# EAGLE board ArduBerry 4_0 (EAGLE 6.3)
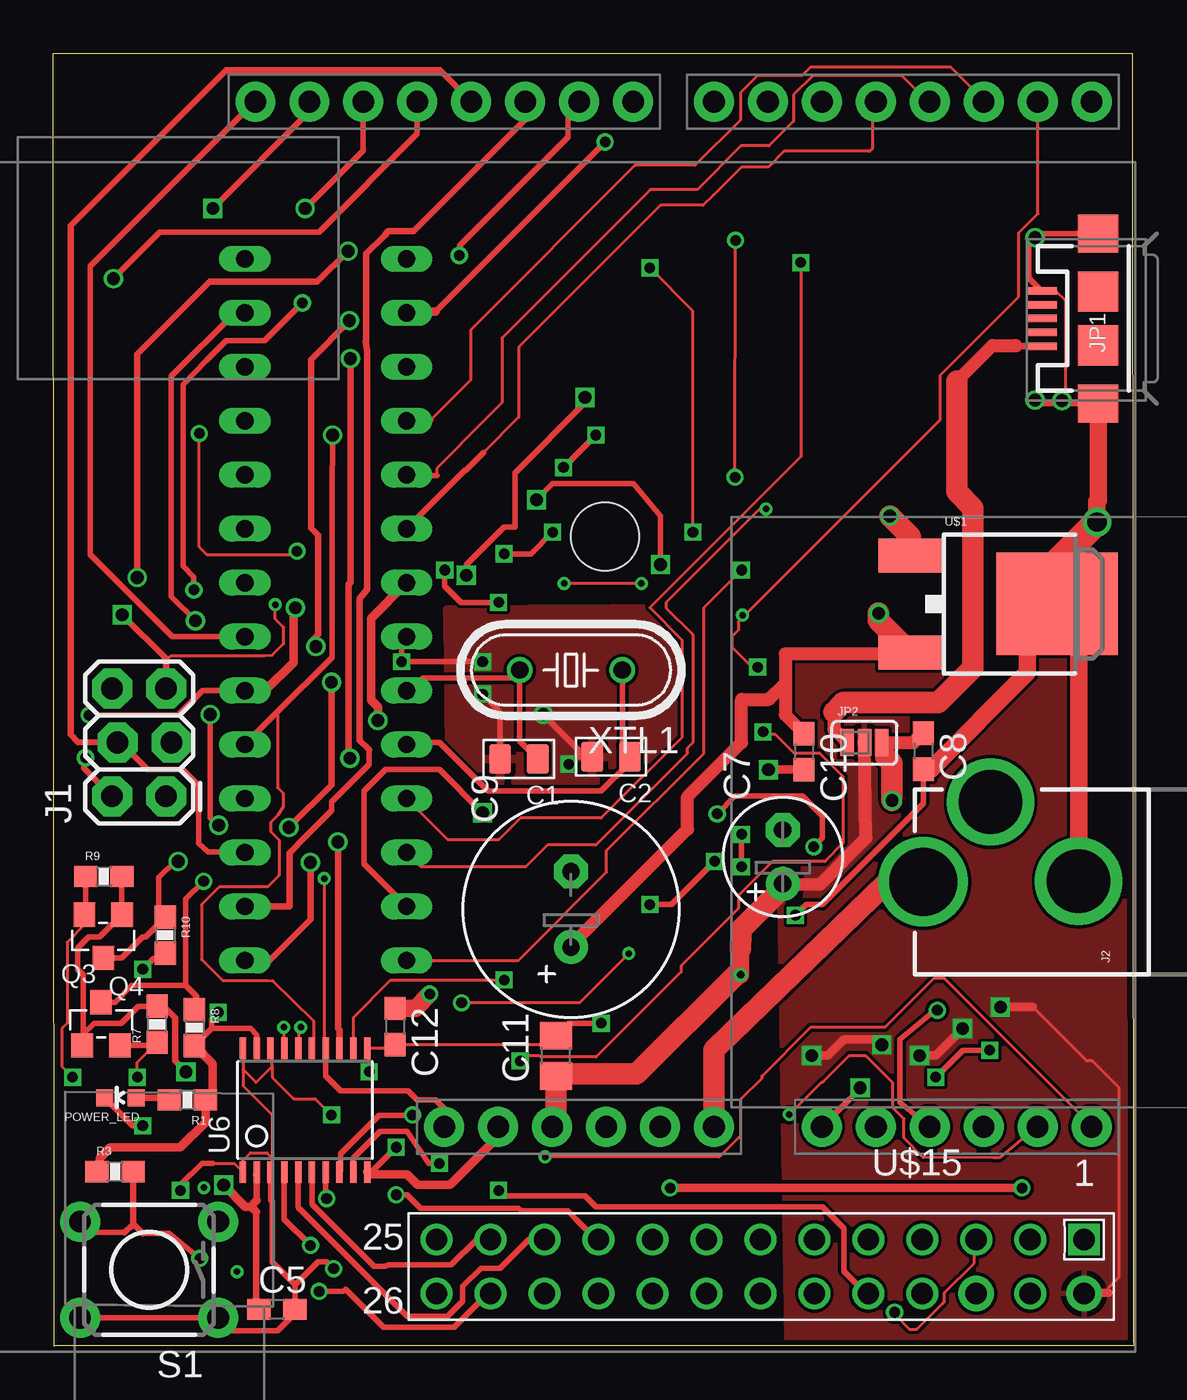
[diagram p0: board, top side]
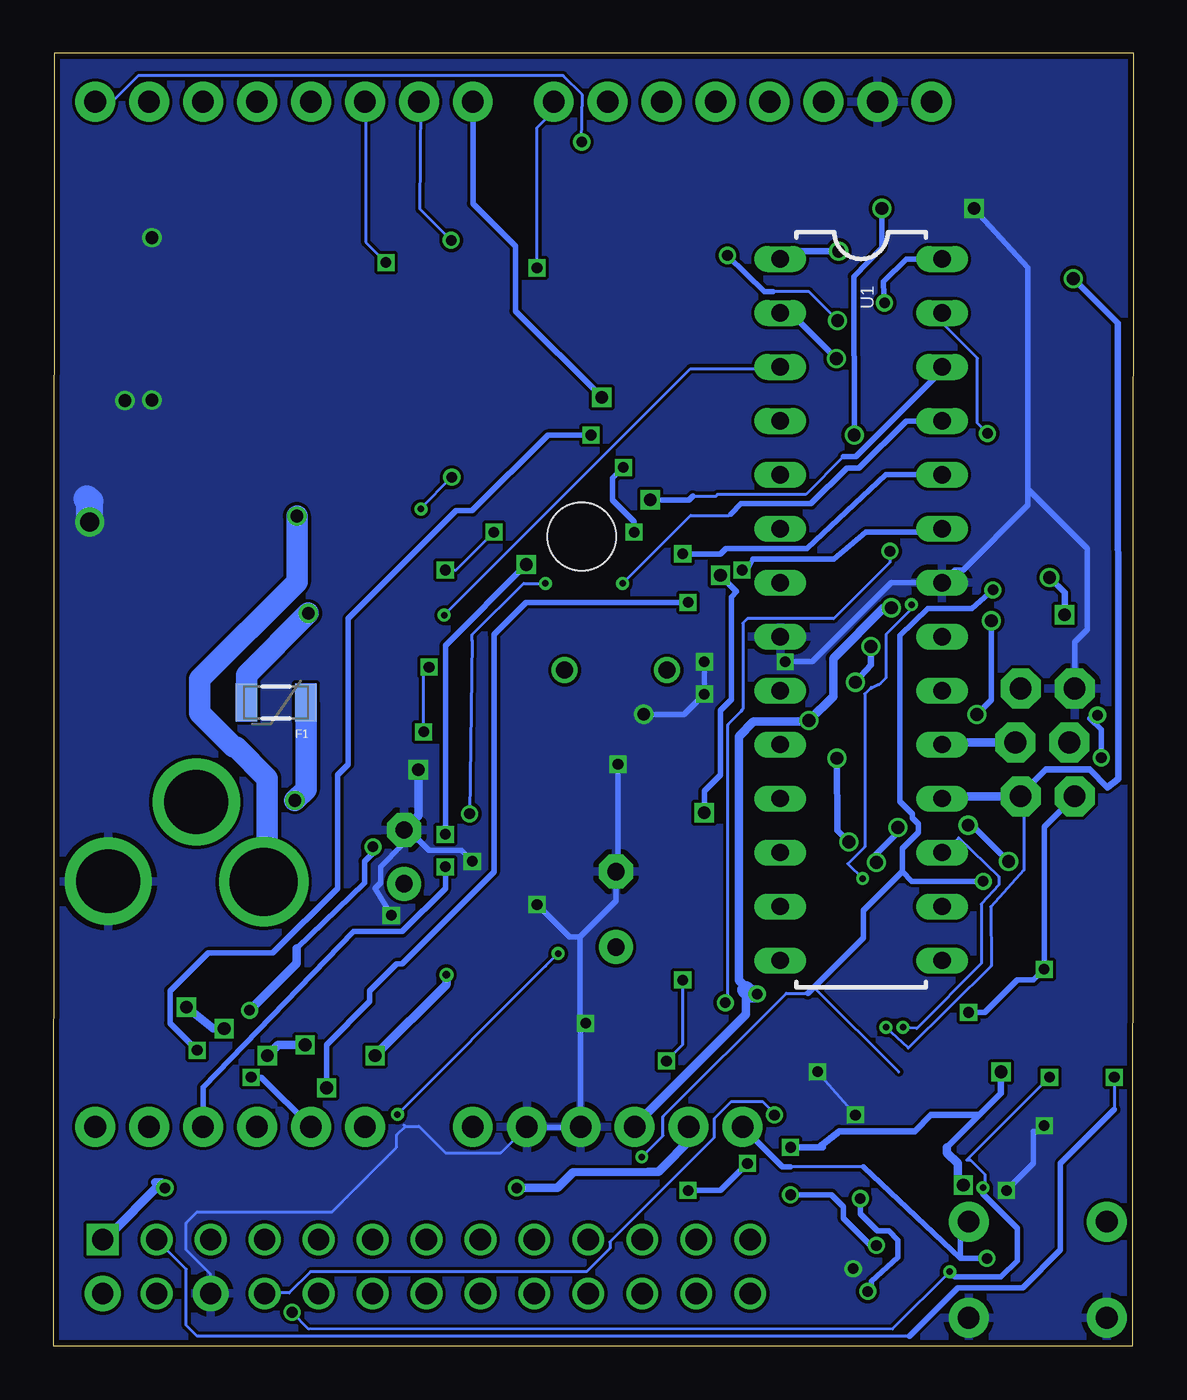
[diagram p1: board, bottom side, seen from below]

Size 50.88 x 60.89 mm. Coordinates in mm from the lower left corner, seen from the top.
Outline: 0.05,0 0,60.89 50.81,60.89 50.86,0.28 50.88,0.02 0.04,0.02
Copper layers (1*2*15*16): Top 0.035mm / dielectric 0.2mm / layer 2 0.0175mm / dielectric 1.1mm / layer 15 0.0175mm / dielectric 0.2mm / Bottom 0.035mm
Design rules "SeeedStudio_DRU_no_angle_20130527": minimum track width 6mil, minimum drill 12mil, track to track 6mil, track to pad 6mil, pad to pad 6mil, via to via 6mil, smd to smd 0mil, copper to edge 10mil, drill to drill 10mil, minimum pad ring 6mil, minimum via ring 6mil, stop-mask expansion 2mil, vias tented up to drill 25mil, thermal gap 10mil
Net classes: 1 DATA: width 0.203 mm, drill 0.305 mm, clearance 0.051 mm; 2 POWER: width 0.152 mm, drill 0.356 mm, clearance 0.051 mm
Holes 3.2 mm at -29.51,11.63 25.99,38.13

## Footprints (pad centres in the part's own frame; a part is rotated, then mirrored left to right if it is on the bottom)
C0805 = smd 1.016 x 1.397: 1 -0.889,0; 2 0.889,0
C0603 = smd 1.1 x 1: 1 -0.85,0; 2 0.85,0
E2,5-6 = drill 0.813 pad 1.6: + -1.27,0 | drill 0.813 pad 1.6 octagon: - 1.27,0
E3,5-10 = drill 0.813 pad 1.6: + -1.778,0 | drill 0.813 pad 1.6 octagon: - 1.778,0
C0805' = smd 1.3 x 1.5: 1 -0.95,0; 2 0.95,0
PTC-1206 = smd 1 x 1.8: 1 -1.4,0; 2 1.4,0
2X3_LOCK = drill 1.016 pad 1.88 octagon: 1 0,0; 2 0,2.54; 3 2.54,-0.254; 4 2.54,2.286; 5 5.08,0; 6 5.08,2.54
POWER_JACK_PTH_LOCK = drill 2.997 pad 4.115: GND 0.025,6.557; GNDBREAK 3.762,10.7 | drill 3.2 pad 4.115: PWR 0,13.878
USB-MICROB = smd 0.35 x 1.4: D+ 0,2.65; D- -0.65,2.65; GND 1.3,2.65; ID 0.65,2.65; VBUS -1.3,2.65 | smd 1.8 x 1.9: MT1 -4,0; MT2 4,0 | smd 1.9 x 1.9: P$1 -1.27,0; P$2 1.27,0
SJ_3_PASTE1&2 = smd 0.635 x 1.27: 1 -0.813,0; 2 0,0; 3 0.813,0
LED-0603 = smd 0.8 x 0.8: A 0,-0.75; C 0,0.75
SOT23 = smd 1.016 x 1.143: 1 -0.889,-1.016; 2 0.889,-1.016; 3 0,1.016
0603-RES = smd 1.1 x 1: 1 -0.85,0; 2 0.85,0
TACTILE-PTH = drill 1.016 pad 1.88: 1 -3.251,2.261; 2 3.251,2.261; 3 -3.251,-2.261; 4 3.251,-2.261
DIL28-3 = drill 0.813 long: 1 -16.51,-3.81; 2 -13.97,-3.81; 3 -11.43,-3.81; 4 -8.89,-3.81; 5 -6.35,-3.81; 6 -3.81,-3.81; 7 -1.27,-3.81; 8 1.27,-3.81; 9 3.81,-3.81; 10 6.35,-3.81; 11 8.89,-3.81; 12 11.43,-3.81; 13 13.97,-3.81; 14 16.51,-3.81; 15 16.51,3.81; 16 13.97,3.81; 17 11.43,3.81; 18 8.89,3.81; 19 6.35,3.81; 20 3.81,3.81; 21 1.27,3.81; 22 -1.27,3.81; 23 -3.81,3.81; 24 -6.35,3.81; 25 -8.89,3.81; 26 -11.43,3.81; 27 -13.97,3.81; 28 -16.51,3.81
DUEMILANOVE_VIAS = drill 1.016 pad 1.88: 3.3V 50.8,13.97; 5V 50.8,16.51; A0 50.8,29.21; A1 50.8,31.75; A2 50.8,34.29; A3 50.8,36.83; A4 50.8,39.37; A5 50.8,41.91; AREF 2.54,2.54; D2 2.54,36.83; D3 2.54,34.29; D4 2.54,31.75; D5 2.54,29.21; D6 2.54,26.67; D7 2.54,24.13; D8 2.54,20.32; D9 2.54,17.78; D10 2.54,15.24; D11 2.54,12.7; D12 2.54,10.16; D13 2.54,7.62; GND@0 50.8,19.05; GND@1 50.8,21.59; GND@2 2.54,5.08; RES 50.8,11.43; RX 2.54,41.91; TX 2.54,39.37; VIN 50.8,24.13
TSSOP20 = smd 0.305 x 0.991: 1 -2.925,-2.918; 2 -2.275,-2.918; 3 -1.625,-2.918; 4 -0.975,-2.918; 5 -0.325,-2.918; 6 0.325,-2.918; 7 0.975,-2.918; 8 1.625,-2.918; 9 2.275,-2.918; 10 2.925,-2.918; 11 2.925,2.918; 12 2.275,2.918; 13 1.625,2.918; 14 0.975,2.918; 15 0.325,2.918; 16 -0.325,2.918; 17 -0.975,2.918; 18 -1.625,2.918; 19 -2.275,2.918; 20 -2.925,2.918
DPAK = smd 1.6 x 3: 1 -2.28,-5.31; 3 2.28,-5.31 | smd 4.826 x 5.715: 4 0,1.588
RASPBERRY-PI_REV1 = drill 1 square: 1 -41.91,21.59 | drill 1 pad 1.676: 2 -41.91,24.13; 6 -36.83,24.13 | drill 1: 3 -39.37,21.59; 4 -39.37,24.13; 5 -36.83,21.59; 7 -34.29,21.59; 8 -34.29,24.13; 9 -31.75,21.59; 10 -31.75,24.13; 11 -29.21,21.59; 12 -29.21,24.13; 13 -26.67,21.59; 14 -26.67,24.13; 15 -24.13,21.59; 16 -24.13,24.13; 17 -21.59,21.59; 18 -21.59,24.13; 19 -19.05,21.59; 20 -19.05,24.13; 21 -16.51,21.59; 22 -16.51,24.13; 23 -13.97,21.59; 24 -13.97,24.13; 25 -11.43,21.59; 26 -11.43,24.13
HC49/S = drill 0.813: 1 -2.413,0; 2 2.413,0

## Placement (x,y rotation side)
C1  22pF  [C0805]  21.93,27.66 180 top
C2  22pF  [C0805]  26.27,27.76 180 top
C5  0.1uf  [C0603]  10.54,1.75 0 top
C7  120uf  [E2,5-6]  34.35,23.05 90 top
C8  0.1uf  [C0603]  40.97,28.02 270 top
C9  1000uf  [E3,5-10]  24.38,20.58 90 top
C10  0.1uf  [C0603]  35.35,28 270 top
C11  10uf  [C0805']  23.68,13.69 90 top
C12  0.1uf  [C0603]  16.1,15.06 270 top
F1  PTCSMD  [PTC-1206]  40.37,30.32 180 bottom
J1  AVR_SPI_PRG_62X3_LOCK  [2X3_LOCK]  5.32,25.89 90 top
J2  POWER_JACKPTH_LOCK  [POWER_JACK_PTH_LOCK]  54.84,21.87 90 top
JP1  USB-MICROB  [USB-MICROB]  49.2,48.39 90 top
JP2  JUMPER-31-2  [SJ_3_PASTE1&2]  38.2,28.42 0 top
POWER_LED  GREEN  [LED-0603]  3.17,11.71 90 top
Q3  MOSFET-N-044020001  [SOT23]  2.26,15.19 0 top
Q4  MOSFET-N-044020001  [SOT23]  2.36,19.3 180 top
R1  330ohm  [0603-RES]  6.32,11.6 180 top
R3  10kOhm  [0603-RES]  2.92,8.23 0 top
R7  10k  [0603-RES]  4.9,15.16 90 top
R8  10k  [0603-RES]  6.65,15.01 270 top
R9  10k  [0603-RES]  2.39,22.12 0 top
R10  10k  [0603-RES]  5.28,19.35 270 top
S1  [TACTILE-PTH]  4.52,3.61 180 top
U1  ATMEGA328P_PDIP  [DIL28-3]  12.83,34.68 270 bottom
U2  ARDUINO_SHIELDNO_SILK  [DUEMILANOVE_VIAS]  6.98,61.14 270 top
U6  [TSSOP20]  11.86,11.13 0 top
U$1  LM2931_FIXED  [DPAK]  45.67,34.95 270 top
U$15  RASPBERRY-PI_REV1  [RASPBERRY-PI_REV1]  6.63,26.62 180 top
XTL1  [HC49/S]  24.38,31.84 180 top

## Library data of the parts
C1 C2 Q3 Q4 = OPL
C5 C8 C10 C12 = resistor
C7 C9 C11 = rcl
F1 = zz SparkFun
J1 J2 = SparkFun-Connectors
JP1 = SparkFun-Connectors; PROD_ID: CONN-09505
JP2 = SparkFun-Passives
POWER_LED = SparkFun-LED; PROD_ID: DIO-00821
R1 R3 R7-R10 = SparkFun-Resistors
S1 = SparkFun-Electromechanical
U1 = SparkFun-DigitalIC
U2 = SparkFun-Boards
U6 = adafruit
U$1 = SparkFun-PowerIC
U$15 = RaspberryPi
XTL1 = crystal; OC_FARNELL: 1667008; OC_NEWARK: unknown

## Nets
5V_IN_USB: JP1.VBUS JP2.1
+3V3 [POWER]: C5.1 Q3.1 Q4.1 R7.2 R9.2 U2.3.3V U6.2 U6.10 U$15.1
+5V [POWER]: C7.+ C11.1 C12.1 J1.2 JP2.2 R1.1 R3.1 R8.2 R10.2 U1.7 U1.20 U2.5V U6.19 U$15.2
ARDUINO_RX: U1.2 U2.RX U6.13
ARDUINO_TX: U1.3 U2.TX U6.12
AREF [DATA]: U1.21 U2.AREF
GND: C1.2 C2.2 C5.2 C7.- C8.2 C9.- C10.2 C11.2 C12.2 J1.6 J2.GND JP1.GND JP1.MT1 JP1.MT2 POWER_LED.C S1.1 S1.2 U1.8 U1.22 U2.GND@0 U2.GND@1 U2.GND@2 U6.1 U6.3 U6.11 U6.18 U6.20 U$1.4 U$15.6
MISO: J1.1 U1.18 U2.D12 U6.16
MOSI: J1.4 U1.17 U2.D11 U6.17
N$4: U$15.26
N$11: POWER_LED.A R1.2
N$48: U$15.7
N$49: U$15.9
N$50: U$15.11
N$51: U$15.13
N$52: U$15.15
N$53: U$15.17
N$54: U$15.25
N$61: U$15.22
N$62: U$15.20
N$63: U$15.18
N$64: U$15.16
N$65: U$15.14
N$66: U$15.12
OSC1: C1.1 U1.9 XTL1.2
OSC2: C2.1 U1.10 XTL1.1
PB0: U1.14 U2.D8
PB1: U1.15 U2.D9
PB2: U1.16 U2.D10
PC0: U1.23 U2.A0
PC1: U1.24 U2.A1
PC2: U1.25 U2.A2
PC3: U1.26 U2.A3
PD2: U1.4 U2.D2
PD3: U1.5 U2.D3
PD4: U1.6 U2.D4
PD5: U1.11 U2.D5
PD6: U1.12 U2.D6
PD7: U1.13 U2.D7
REG_OUT [POWER]: C8.1 F1.1 JP2.3
RESET: J1.5 R3.2 S1.3 S1.4 U1.1 U2.RES U6.14
RPI_MISO: U6.5 U$15.21
RPI_MOSI: U6.4 U$15.19
RPI_RESET: U6.7 U$15.24
RPI_RX: U6.9 U$15.10
RPI_SCK: U6.6 U$15.23
RPI_SCL: Q3.2 R7.1 U$15.5
RPI_SDA: Q4.2 R9.1 U$15.3
RPI_TX: U6.8 U$15.8
SCK: J1.3 U1.19 U2.D13 U6.15
SCL: Q3.3 R8.1 U1.28 U2.A5
SDA: Q4.3 R10.1 U1.27 U2.A4
VIN: J2.PWR U2.VIN U$1.1
VIN_5V: C9.+ C10.1 F1.2 U$1.3

## Tracks (layer width: path | path; a pad name or v marks a point on that pad's centre or on a via)
5V_IN_USB
  Top 0.305: 45.34,47.09 JP1.VBUS
  Top 0.61: 42.55,45.44 44.22,47.12 45.31,47.12 45.34,47.09 | 36.75,29.87 36.75,29.06 JP2.1
  Top 1.016: 42.55,45.44 42.55,40.23 43.31,39.47 43.31,31.93 41.68,30.3 37.19,30.3 36.75,29.87
+3V3  (via drill 0.5, 0.6)
  Top 0.254: R9.2 3.24,20.33 Q4.1 3.23,20.32 2.18,19.28 1.68,19.28 1.17,18.77 1.17,17.75 1.42,17.5 1.42,14.71 | 1.42,14.71 1.42,14.22 Q3.1 | R7.2 4,16.01 3.2,15.21 1.93,15.21 1.42,14.71
  Top 0.305: R7.2 5.2,16.01 5.74,15.47 5.74,13.44 v6.25,12.93 | 9.55,6.32 9.55,1.89 C5.1 | 9.59,6.87 U6.2 9.59,8.14 9.55,8.1 | U6.10 14.99,8.21 v16.15,9.37
  Top 0.406: v45.61,7.46 v29.05,7.46 | U2.3.3V 20.96,9.86 18.69,7.59 17.17,7.59 16.66,8.1 14.89,8.1 U6.10 | v8.03,7.59 9.04,6.58 9.3,6.58 | 9.3,6.58 9.55,6.32 | 9.3,6.58 9.59,6.87
  Bottom 0.305: v6.25,12.93 6.25,11.91 7.26,10.9 | 7.26,10.9 8.79,9.37 | 14.63,9.37 14.83,9.37 | 14.83,9.37 13.87,10.13 10.31,10.13 9.55,10.9 7.26,10.9 | v16.15,9.37 15.08,9.37 14.83,9.37
  Bottom 0.406: v29.05,7.46 28.73,7.47 27.13,7.47 26.39,8.2 22.86,8.22 22.39,8.22 20.73,9.88 20.73,10.11 U2.3.3V | v45.61,7.46 46.06,7.72 45.76,7.72 48.36,5.12 U$15.1 | 8.79,9.37 8.79,9.12 8.28,8.61 8.28,7.85 v8.03,7.59
+5V  (via drill 0.36, 0.5, 0.6)
  Top 0.152: U6.19 9.59,13.98 9.55,13.94 | 49.68,2.51 49.68,2.77 50.19,3.28 50.19,12.17 48.92,13.44 48.67,13.44 46.13,15.98
  Top 0.254: U1.20 7.05,30.87 5.89,29.72 v1.7,29.72 | v1.52,27.71 1.45,27.22 J1.2 | 7.52,11.95 R1.1 | U6.19 9.59,14.67 9.3,14.96 7.45,14.96 | 7.45,14.96 R8.2 6.72,14.16 | R10.2 5.53,18.26 4.72,18.26 v4.22,17.75 | 7.45,14.96 7.45,15.4 v7.77,15.72
  Top 0.406: U2.5V 23.68,10.34 | U1.20 9.99,30.87 11.33,32.21 11.33,34.7 v11.4,34.77 | v15.29,29.46 15.29,30.1 14.96,30.43 14.96,34.27 U1.7 | 34.26,21.52 C7.+ | 23.86,12.82 C11.1 | 32.16,17.52 v32.36,17.5 | 7.52,11.95 7.52,13.3 R8.2 | v35.71,13.69 36.47,13.69 37.24,14.45 38.76,14.45 v39.01,14.2 | v40.79,13.69 41.55,13.69 v42.82,14.96 | v44.6,15.98 46.13,15.98 | 49.68,2.51 48.56,2.51 U$15.2 | R1.1 7.17,10.55 5.99,9.37 2.69,9.37 2.18,8.86 2.18,8.34 R3.1
  Top 0.61: C7.+ 36.1,21.75 38.28,23.93 JP2.2
  Top 0.813: 32.36,18.72 v32.36,17.5 | C12.1 17.06,15.91 v17.73,16.59
  Top 1.016: 23.68,10.34 C11.1 | 32.36,18.72 32.39,19.41 32.41,19.65 34.26,21.52 | 23.86,12.82 27.46,12.82 32.16,17.52
  Bottom 0.254: v1.7,29.72 2.06,29.57 1.52,29.03 v1.52,27.71 | J1.2 4.22,24.45 v4.22,17.75 4.72,17.25 5.49,17.25 7.01,15.72 v7.77,15.72
  Bottom 0.406: v11.4,34.77 11.76,34.77 14.15,32.38 14.15,30.61 v15.29,29.46 15.46,29.42 17.89,29.42 18.59,28.72 18.59,17.22 18.26,16.89 18.26,16.79 18.26,15.62 23.46,10.42 U2.5V | v32.36,17.5 32.36,17.04 v35.71,13.69 | v39.01,14.2 40.28,14.2 v40.79,13.69 | v42.82,14.96 43.33,14.96 v44.6,15.98
  Bottom 0.813: v17.73,16.59 18.06,16.59 18.26,16.79
  pour Top: 33.78,49.5 34.54,0.23 50.65,0.13 50.75,49.61
ARDUINO_RX  (via drill 0.5, 0.6)
  Top 0.254: 18.01,48.72 v25.99,56.7
  Top 0.305: v14,46.51 14,35.97 13.92,35.89 13.92,30.23 13.92,27.66 v13.97,27.69 | v13.41,23.75 13.41,14.96 13.49,14.88 U6.13
  Top 0.406: 18.01,48.72 16.71,48.72 U1.2
  Bottom 0.152: v25.99,56.7 25.96,58.92 26.86,59.82 46.86,59.82 48.06,58.62 48.86,58.62 U2.RX
  Bottom 0.305: U1.2 16.14,48.65 v14,46.51 | v13.97,27.69 13.94,24.28 v13.41,23.75
ARDUINO_TX  (via drill 0.3, 0.5)
  Top 0.152: 32.51,34.37 32.26,34.12 32.26,33.72 31.96,33.42 31.96,32.92 32.9,31.98 v33.17,31.98 | v32.46,34.42 32.51,34.37 | 32.51,34.37 41.76,43.62 41.76,45.72 45.46,49.42 45.46,52.42 46.36,53.32 46.36,58.42 U2.TX | U6.12 14.14,15.48 15.9,17.25 v21.23,17.25 | v22,13.44 22.25,13.69 22.89,13.69 22.96,13.62 25.56,13.62 29.56,17.62 29.56,17.92 32.26,20.62 32.26,21.22 33.86,22.82 36.34,22.82 37.19,23.69 37.19,25.52 37.19,26.82 36.07,27.94 34.87,27.94 34.01,28.8 33.55,28.8 v33.43,28.93
  Top 0.254: U2.TX 46.36,58.52
  Top 0.305: U1.3 17.64,46.11
  Bottom 0.152: v32.46,34.42 20.86,46.02 16.66,46.02 U1.3 | v21.23,17.25 21.23,14.2 v22,13.44 | v33.43,28.93 33.43,31.72 v33.17,31.98
AREF
  Top 0.254: U2.AREF 9.5,58.6 1.75,50.85 1.75,37.29 5.61,33.43 9.01,33.43 U1.21
GND  (via drill 0.48, 0.5, 0.6, 0.9)
  Top 0.152: 34.26,24.22 C7.- | 46.25,44.48 46.26,44.52 v46.23,44.55 | 46.13,52.25 46.16,52.22 v46.23,52.2 | 10.31,8.86 10.31,10.9 8.94,12.27 U6.20 8.94,13.03 9.55,12.42 10.31,13.18 | 10.31,8.86 10.31,8.28 U6.3 | 10.31,13.18 10.31,13.97 U6.18 | POWER_LED.C 2.42,11.68 | 7.52,8.61 8.53,8.61 U6.1 8.94,8.76 9.3,9.12 10.06,9.12 10.31,8.86 | 10.31,13.18 10.31,12.67 11.33,11.66 12.34,11.66 v13.11,10.9 | v14.88,12.93 14.88,13.95 U6.11 15.93,14.04 C12.2 23.25,14.21 C11.2 | JP1.GND 47.21,49.69 47.65,49.25 47.65,44.68 v47.5,44.53
  Top 0.254: JP1.MT2 46.27,52.39 46.13,52.25 45.95,52.07 45.95,50.29 JP1.GND | JP1.MT1 46.34,44.39 46.25,44.48 | 11.39,2.91 C5.2 11.39,1.56 10.57,0.74 8.38,0.74 S1.1 S1.2 | 11.39,2.91 12.47,3.99 12.88,3.99 v13.21,3.66 | U2.GND@2 12.07,58.12 v7.52,53.57 | v23.07,29.76 25.17,27.66 25.3,27.66 25.38,27.74 C2.2 24.63,27.76 v24.28,27.41 | U1.8 16.41,33.18 v16.41,32.23 v20.22,32.23 | U6.3 10.24,6.91 10.31,6.83 10.31,3.99 11.39,2.91 | C1.2 21.04,29.64 20.98,29.69 20.98,29.95 v20.22,30.71 | C8.2 40.97,25.55 36.22,20.8 35.46,20.8 v34.95,20.29 | v25.81,15.21 24.26,15.21 23.25,14.21 23.28,14.21 23.77,14.71 | v28.09,20.8 29.11,20.8 v31.14,22.83 | v5.99,7.34 5.99,7.59 7.01,8.61 7.52,8.61 | v4.22,10.39 3.74,10.39 POWER_LED.C
  Top 0.406: C10.2 v33.68,27.15
  Top 0.813: J2.GND 48.28,33.93 U$1.4 | C8.2 41.31,27.17 45.87,31.72 45.87,34.66 47.26,36.04 | JP1.MT1 49.2,39.83 49.15,39.78 v49.15,38.81
  Top 1.27: U$1.4 47.26,36.04 47.26,36.92 v49.15,38.81
  Bottom 0.152: 34.36,10.42 34.29,10.36 | 26.16,10.32 U2.GND@0 | U$15.6 43.46,3.4 44.6,4.55 44.6,5.82 44.09,6.32 37.74,6.32 34.7,9.37 34.7,9.95 34.29,10.36 | 34.29,10.36 33.65,10.36 32.41,9.12 29.79,9.12 28.94,9.97 U2.GND@1 | v13.11,10.9 v14.88,12.93
  Bottom 0.254: v13.21,3.66 13.21,3.61 13.23,3.58 | v7.52,53.57 4.98,50.77 4.98,40.36 | 4.98,40.36 4.98,39.6 8.03,36.55 8.42,36.55 U1.22 11.42,35.95 15.14,32.23 v16.41,32.23 | J1.6 2.78,33.16 2.18,33.76 2.18,37.57 4.98,40.36 | v24.28,27.41 24.28,22.45 C9.- 24.38,20.96 26.06,19.28 | v20.22,32.23 v20.22,30.71 21.17,29.76 v23.07,29.76 | v34.95,20.29 35.71,21.56 35.46,21.82 35.46,22.58 34.44,23.6 34.44,24.23 C7.- 33.88,23.85 33.68,23.85 33.17,23.34 31.65,23.34 v31.14,22.83 | 26.06,19.28 26.06,15.47 v25.81,15.21 26.04,14.99 U2.GND@0 | 26.06,19.28 26.57,19.28 v28.09,20.8 | 26.16,10.32 28.59,10.32 28.94,9.97 | v5.99,7.34 4.72,8.61 4.72,10.13 4.47,10.13 v4.22,10.39
  Bottom 0.406: v33.68,27.15 33.68,24.99 C7.-
  Bottom 1.27: v49.15,38.81 49.15,39.78 49.28,39.9
  pour Bottom: 0.03,64.74 50.93,64.74 50.93,-0.28 0.1,-0.28 0.1,64.14
  pour Top: 18.54,34.7 30.01,34.77 30.1,26.22 18.67,26.12 18.57,34.11
MISO  (via drill 0.3, 0.6)
  Top 0.152: v11.66,15.02 11.56,14.92 11.56,14.12 U6.16
  Top 0.254: U2.D12 17.15,57.1 12.52,52.45 5.03,52.45 3.44,50.89 3.2,50.65
  Top 0.305: v2.84,50.27 2.84,50.29 3.44,50.89
  Bottom 0.152: v11.66,15.02 10.61,14.04 6.71,17.92 6.73,20.7 5.16,22.42 5.16,25.82 J1.1
  Bottom 0.305: J1.1 5.32,25.97 4.14,27.15 2.06,27.15 1.24,26.31 0.74,26.72 0.76,48.18 v2.84,50.27
  Bottom 0.406: J1.1 9.02,25.89 U1.18
MOSI  (via drill 0.3)
  Top 0.152: v10.86,15.02 10.86,14.12 U6.17
  Top 0.254: J1.4 3.19,28.43 4.45,27.15 6.1,27.15 6.86,26.42 6.86,23.67 7.29,23.27 8.6,23.27 U1.17
  Top 0.305: 3.19,28.43 1.16,28.46 0.84,28.8 0.84,52.76 8.15,60.07 18.21,60.07 U2.D11
  Bottom 0.152: v10.86,15.02 10.21,14.97 7.18,18.02 7.18,20.83 6.36,21.72 6.36,22.12 8.24,23.94 8.94,23.24 U1.17
N$11
  Top 0.305: POWER_LED.A 5.37,11.71 R1.2
OSC1
  Top 0.254: U1.9 16.83,30.87 17.42,31.47 21.6,31.47 XTL1.2 21.97,28.5 C1.1
OSC2
  Top 0.254: XTL1.1 26.8,28.12 C2.1 27.16,27.49 25.81,26.14 20.47,26.14 18.19,28.42 16.73,28.42 U1.10
PB0  (via drill 0.5)
  Top 0.152: U1.14 21.91,18.17 26.06,22.33 26.06,23.34 30.63,27.91 30.63,34.77 v32.41,36.55 | v30.12,38.33 30.12,48.74 v28.09,50.77
  Bottom 0.152: v32.41,36.55 31.9,36.55 v30.12,38.33 | v28.09,50.77 28.09,57.38 27.33,58.14 27.33,58.57 U2.D8
PB1  (via drill 0.5, 0.6)
  Top 0.254: v19.13,51.36 19.13,51.82 24.23,56.92 24.23,58.06 U2.D9
  Top 0.305: v13.94,48.29 13.94,48.26 12.14,46.46 12.14,38.56 | 12.14,38.56 12.14,38.53 | 12.14,38.53 12.14,38.56 | 12.14,38.56 12.14,38.53 | 12.14,38.53 12.47,38.2 12.47,33.5 12.14,33.17 v12.37,32.94 | v13.11,31.27 13.11,26.44 v11.1,24.43 | v12.12,22.78 12.12,20.09 10.46,18.44 10.2,18.17 U1.15
  Bottom 0.152: 16.99,49.65 15.29,49.65 13.96,48.32 v13.94,48.29 | 24.76,58.52 U2.D9
  Bottom 0.254: 16.99,49.65 17.39,49.65 v19.13,51.36
  Bottom 0.305: v12.37,32.94 12.37,32.08 v13.11,31.27 | v11.1,24.43 11.1,24.21 12.12,23.19 12.12,23.04 v12.12,22.78
PB2
  Top 0.254: 14.88,28.07 14.88,27.41 13.11,25.63 13.11,25.22 11.89,24
  Top 0.305: U2.D10 22.23,57.76 16.97,52.5 15.77,52.5 15.6,52.3 14.73,51.43 14.73,47.32 14.71,47.29 14.78,46.89 14.78,35.64 14.43,35.2 14.43,28.52 14.86,28.12 14.88,28.07 | 11.89,24 11.13,23.24 11.13,20.7 U1.16
PC0  (via drill 0.5, 0.6)
  Top 0.254: v38,12.17 37.52,11.66 U2.A0 | v20.98,35.03 19.2,35.03 18.44,35.79 v18.44,36.55
  Bottom 0.254: v38,12.17 38,14.2 35.97,16.23 35.97,16.74 34.7,18.01 34.44,18.01 30.12,22.33 30.12,33.5 28.6,35.03 v20.98,35.03 | v18.44,36.55 18.19,36.55 17.93,37.06 14.12,37.06 12.6,38.33 9.19,38.33 U1.23
PC1  (via drill 0.5)
  Top 0.254: v21.23,37.31 22.5,37.31 v23.52,38.33 | v24.03,41.38 v25.55,42.9 | v44.09,13.94 42.82,13.94 v41.55,12.67
  Bottom 0.254: U1.24 11.67,41.03 15.39,37.57 19.2,37.57 19.46,37.31 v21.23,37.31 | v23.52,38.33 23.52,38.84 24.54,39.85 24.54,40.87 v24.03,41.38 | v25.55,42.9 27.58,42.9 31.14,39.34 31.9,39.34 36.98,34.26 36.98,27.41 37.49,26.9 37.49,21.56 40.54,18.52 43.59,18.52 45.36,16.74 45.36,15.21 v44.09,13.94 | v41.55,12.67 41.07,12.67 U2.A1
PC2  (via drill 0.3, 0.5)
  Top 0.152: v27.7,35.92 v24.06,35.92
  Top 0.254: 31.27,25.15 v31.27,25.07 32.11,25.91 35.28,25.91 36.22,24.97 36.22,23.93 v35.81,23.52 | v41.63,15.82 41.5,15.82 39.88,14.45 39.88,11.48 U2.A2
  Bottom 0.152: v24.06,35.92 20.86,39.12 19.06,39.12 18.97,39.19 | v27.7,35.92 28.72,35.92 31.14,33.5 31.14,33.25 31.16,33.22 v31.27,25.07
  Bottom 0.254: U1.25 10.71,43.57 12.93,41.35 13.51,41.35 15.19,39.67 18.49,39.67 18.97,39.19 | 39.42,18.75 36.22,21.82 36.22,22.83 35.81,23.24 v35.81,23.52
  Bottom 0.406: 39.42,18.75 39.42,18.03 v41.63,15.82
PC3  (via drill 0.5, 0.6)
  Top 0.254: v28.6,36.8 28.6,39.09 27.33,40.61 23.52,40.61 v22.76,39.85 | v32.41,22.58 v32.41,24.1
  Bottom 0.152: 13.67,41.88 15.44,40.11 19.61,40.11 19.66,40.02 20.76,40.02
  Bottom 0.254: U1.26 9.02,45.94 13.08,41.88 13.67,41.88 | U2.A3 43.82,12.19 36.73,19.53 34.44,19.53 32.41,21.56 v32.41,22.58 | v28.6,36.8 32.41,32.99 v32.41,24.1 | v22.76,39.85 20.93,39.85 20.76,40.02
PD2
  Top 0.152: U1.4 16.76,43.62 17.86,43.62 17.75,43.59 19.66,45.49 19.66,47.85 27.41,55.6 30.23,55.6 32.36,57.74 32.36,58.12 32.36,59.02 33.16,59.82 35.26,59.82 35.66,60.22 42.26,60.22 43.76,58.72 U2.D2
  Top 0.254: U2.D2 43.82,58.5 | 16.66,43.59 U1.4
PD3
  Top 0.152: 18.06,41 18.06,41.12 18.06,41.32 20.32,43.61 21.13,44.42 21.13,47.47 28.12,54.46 30.33,54.46 32.39,56.51 33.71,56.51 34.86,57.67 34.86,58.12 34.86,58.92 35.76,59.82 39.96,59.82 41.16,58.62 U2.D3
  Top 0.254: U2.D3 41.28,58.47 | 18.08,41 18.06,41 16.68,41 U1.5
PD4
  Top 0.152: 20.27,42.09 21.92,43.74 21.92,47.04 28.6,53.72 30.61,53.72 31.09,54.2 32.41,55.52 33.68,55.52 34.42,56.26 38.43,56.26 38.56,56.39 38.56,58.52 U2.D4
  Top 0.254: U2.D4 38.66,58.6 | U1.6 19.4,41.25 19.43,41.25 20.27,42.09
PD5  (via drill 0.5)
  Top 0.152: v35.2,51.03 35.2,41.88 28.09,34.77 29.62,33.25 29.62,28.68 25.81,24.87 22,24.87 20.98,23.85 18.58,23.85 U1.11
  Top 0.254: U2.D5 36.2,58.55
  Bottom 0.152: U2.D5 36.16,58.52 36.16,51.99 v35.2,51.03
PD6  (via drill 0.3, 0.5)
  Top 0.152: v32.11,40.92 v32.13,52.07 | v33.56,39.42 33.26,39.42 28.86,35.02 28.86,34.76 30.12,33.5 30.12,28.42 29.87,28.17 29.87,27.91 25.55,23.6 23.27,23.6 22.25,22.58 17.31,22.58 U1.12
  Top 0.305: U2.D6 33.66,58.14
  Bottom 0.152: v33.56,39.42 33.55,39.47 v32.11,40.92 | v32.13,52.07 33.59,53.53 33.56,58.52 U2.D6
PD7  (via drill 0.6)
  Top 0.254: v25.04,44.68 25.04,44.42 21.74,41.12 21.74,38.58 21.23,38.58 19.46,36.8 v19.46,36.3 | U1.13 14.63,22.72 14.63,26.14 15.65,27.15 18.19,27.15 v20.22,25.12
  Bottom 0.254: U2.D7 31.12,53.8 29.11,51.79 29.11,48.74 v25.04,44.68 | v20.22,25.12 20.22,26.14 19.46,26.9 19.46,29.95 18.95,30.45 18.95,35.28 18.69,35.53 v19.46,36.3
REG_OUT  (via drill 0.6)
  Top 0.406: 39.22,27.74 39.22,28.22 JP2.3
  Top 0.61: JP2.3 40.5,28.42 C8.1
  Top 1.016: v39.5,25.7 39.5,27.46 39.22,27.74
  Bottom 1.016: F1.1 38.97,26.23 v39.5,25.7
RESET  (via drill 0.3, 0.5, 0.6)
  Top 0.152: v12.76,22.02 12.76,14.12 U6.14 | v10.46,34.92 10.46,34.25 10.86,33.85 10.86,33.09 10.31,32.54 9.96,32.52 5.56,32.52 5.46,32.42 5.32,32.38
  Top 0.254: U6.14 12.84,12.74 13.54,12.04 16.71,12.04 17.15,11.61 18.01,11.61 18.42,11.2 U2.RES | 3.38,5.36 1.78,5.36 S1.4 | 4.22,5.33 5.46,5.33 v6.91,4.14
  Top 0.305: 3.38,5.36 3.77,5.75 R3.2 3.77,5.78 4.22,5.33 | J1.5 5.32,32.38 v3.25,34.44 | v3.96,36.19 3.96,46.71 7.37,50.11 12.42,50.11 v13.89,51.56
  Bottom 0.152: 12.73,8.46 16.15,8.46 | v12.76,22.02 13.46,22.72 12.66,23.52 12.66,30.72 12.36,31.02 12.34,30.99 11.99,31.16 11.94,31.2 11.66,31.48 11.66,33.52 10.46,34.72 v10.46,34.92
  Bottom 0.254: 8.15,4.14 12.73,8.46 | 16.15,8.46 16.54,8.46 U2.RES | v6.91,4.14 8.15,4.14 | 8.15,4.14 8.15,5.49 S1.3
  Bottom 0.305: v3.25,34.44 3.25,35.48 v3.96,36.19 | v13.89,51.56 16.27,51.56 U1.1
RPI_MISO
  Top 0.254: U$15.21 22.35,5.03 22.35,5 21.03,3.68 20.14,3.68 19.28,2.82 19.28,2.13 18.57,1.42 16.66,1.42 15.01,3.07 11.54,6.55 U6.5
RPI_MOSI  (via drill 0.5)
  Top 0.254: U$15.19 25.58,5.03 24.61,5.99 24.23,6.38 22.05,6.38 21.92,6.5 17.3,6.5 16.81,6.98 16.66,7.14 v16.15,7.14 | U6.4 10.89,5.98 v12.12,4.75
  Bottom 0.254: v12.12,4.75 12.42,4.78 13.67,6.02 13.67,6.58 14.22,7.14 v16.15,7.14
RPI_RESET  (via drill 0.5)
  Top 0.254: U$15.24 20.47,2.49 18.87,0.89 15.57,0.89 13.77,2.69 13.67,2.59 v12.52,2.59 | U6.7 12.84,7 v12.88,6.96
  Bottom 0.254: v12.88,6.96 12.88,6.25 12.07,5.44 11.53,5.44 11.1,5 11.1,4.19 12.34,3.07 12.34,2.84 12.42,2.77 12.42,2.69 v12.52,2.59
RPI_RX  (via drill 0.5)
  Top 0.254: U$15.10 38.28,2.49 37.24,3.53 37.24,5.56 36.22,6.58 25.55,6.58 25.04,7.09 21.23,7.09 v20.98,7.34 | v18.19,8.61 17.68,8.61 16.66,10.13 15.39,10.13 14.12,8.86 U6.9
  Bottom 0.254: v20.98,7.34 19.46,7.34 v18.19,8.61
RPI_SCK
  Top 0.254: U$15.23 19.94,5.03 18.75,3.84 15.8,3.84 15.62,3.76 15.11,3.76 15.01,3.86 12.19,6.69 U6.6
RPI_SCL  (via drill 0.3, 0.5)
  Top 0.152: 43.36,5.02 43.36,3.92 41.96,2.52 41.96,2.12 41.86,2.01 40.67,0.81 40.31,0.81 39.62,1.5 v39.62,1.61 | v3.96,12.67 3.96,13.37 R7.1
  Top 0.254: Q3.2 4.76,14.17 R7.1
  Top 0.406: U$15.5 43.37,5.03 43.36,5.02
  Bottom 0.152: v39.62,1.61 39.62,1.6 38.84,0.81 11.36,0.82 v8.66,3.52 | v3.96,12.67 7.86,8.77 7.68,8.77 7.01,8.1 7.01,7.56 v7.1,7.47
  Bottom 0.254: v7.1,7.47 7.1,7.18 5.49,5.56 5.49,4.04 6.25,3.28 8.42,3.28 v8.66,3.52
RPI_SDA  (via drill 0.5)
  Top 0.152: 1.45,20.32 1.45,19.81 0.66,19.02 0.66,15.21 0.41,14.96 0.41,13.18 v0.91,12.67 0.66,12.93
  Top 0.254: R9.1 1.54,20.38 Q4.2 1.45,20.32
  Bottom 0.152: 10.57,0.48 44.09,0.48 44.6,0.99 44.6,3.63 U$15.3 | v0.91,12.67 0.91,11.15
  Bottom 0.254: 0.91,11.15 3.45,8.61 3.45,4.55 5.23,2.77 8.28,2.77 10.57,0.48
RPI_TX  (via drill 0.5)
  Top 0.254: v16.92,10.9 16.84,10.9 16.81,10.87 15.34,10.87 13.54,9.07 13.54,8.26 U6.8
  Bottom 0.152: U$15.8 40.86,2.52 39.76,2.52 38.76,3.52 25.76,3.52 24.66,4.62 24.66,4.92 19.76,9.82 19.76,10.72 18.96,11.52 17.46,11.52 16.96,11.02 v16.92,10.9
SCK  (via drill 0.6)
  Top 0.152: U6.15 12.26,14.12 12.26,15.32 10.34,17.22 10.09,17.22 7.99,17.22 6.99,18.22 6.99,20.8 7.81,21.62 9.26,21.62 10.11,21.64 10.64,22.17 10.64,22.18 10.64,23.84 10.25,24.24 10.24,24.66 10.56,24.99 10.82,25.4 10.83,26.05 10.56,26.31 10.56,29.72 10.49,29.8
  Top 0.254: U2.D13 14.61,56.29 v11.86,53.57 | v13.16,42.9 13.13,39.98 13.13,32.44 10.49,29.8 U1.19
  Bottom 0.254: v11.86,53.57 11.86,51.71 13.18,50.37 v13.16,42.9
  Bottom 0.406: J1.3 9.02,28.43 U1.19
SCL  (via drill 0.3, 0.5)
  Top 0.152: U2.A5 48.86,10.42 41.96,17.32 41.46,17.32 39.16,15.02 35.66,15.02 33.36,12.72 33.36,12.62 32.36,11.62 32.36,9.92 31.36,8.92 v23.16,8.92
  Top 0.254: v11.73,49.12 9.96,47.35 8.15,47.35 7.21,46.41 6.12,45.29 6.12,36.73 6.63,36.22 v6.63,35.61 | Q3.3 2.92,16.21 3.71,16.99 6.25,16.99 | 6.25,16.99 6.76,16.48 6.76,15.96 R8.1 | 6.25,16.99 6.25,21.06 v7.09,21.89
  Bottom 0.152: 15.05,16.91 11.06,12.92 | v23.16,8.92 22.16,9.92 22.16,10.82 16.36,16.62 15.46,16.62 15.34,16.61
  Bottom 0.254: 8.6,51.19 U1.28 10.71,51.19 11.79,50.11 11.79,50.04 v11.73,49.12 | v6.63,35.61 7.62,34.75 9.7,34.75 11,33.48 11,25.65 10.41,25.07 10.41,24.87 10.13,24.59 10.13,24.21 10.9,23.44 10.9,22.35 | 10.9,22.35 12.73,20.52 12.73,19.23 15.05,16.91 15.34,16.61 | v7.09,21.89 10.44,21.89 10.9,22.35
SDA  (via drill 0.3, 0.5, 0.6)
  Top 0.152: U2.A4 46.26,10.32 44.55,8.88 44.25,8.88 40.96,8.9 40.06,9.82 40.06,10.72 39.52,11.26 39.52,12.42 38.25,13.69 37.49,13.69 36.25,12.45 36.19,12.45 v34.66,10.92 | v6.88,42.98 6.88,37.64 7.24,37.29 11.33,37.29 v11.48,37.44 | v27.1,18.49 24.79,16.18 v19.23,16.18
  Top 0.254: U1.27 8.54,48.65 5.56,45.67 5.56,35.31 v6.71,34.16 | v7.39,29.74 7.39,24.87 v7.8,24.54 | v5.89,22.83 5.74,22.83 4.98,22.07 4.98,20.51 R10.1 4.36,19.28 4.22,19.28 3.23,18.29 Q4.3
  Bottom 0.152: v6.88,42.98 7.36,43.46 7.36,46.52 8.96,48.12 8.96,48.62 U1.27 | v34.66,10.92 27.69,17.91 v27.1,18.49 | v19.23,16.18 19.09,16.42 19.09,29.28 18.47,29.9 18.49,29.93 18.41,30.01 18.41,34.04 18.19,34.26 14.12,34.26 11.48,36.91 v11.48,37.44
  Bottom 0.254: v6.71,34.16 6.71,30.43 v7.39,29.74 | v7.8,24.54 7.8,24.74 v5.89,22.83
VIN  (via drill 0.6)
  Top 1.016: U$1.1 40.36,38.13 v39.4,39.09 | J2.PWR 39.27,21.87 31.12,13.97 U2.VIN
  Bottom 1.016: v39.4,39.09 39.4,35.99 43.97,31.42 43.97,29.82 42.37,28.22 42.27,28.22 40.79,26.75 40.79,22.04 J2.PWR
VIN_5V  (via drill 0.6)
  Top 0.61: U$1.3 40.3,32.61 34.47,32.61 34.47,31.22 | 34.47,31.22 34.47,29.73 C10.1 | C9.+ 24.38,18.87 29.87,24.36 29.87,25.88 32.41,28.42 32.41,30.45 33.71,30.45 34.47,31.22
  Top 1.016: v38.86,34.52 38.86,34.17 U$1.3
  Bottom 1.016: F1.2 41.77,31.61 v38.86,34.52

## Text on the board
121bmp: 8 | 7 | 4 | 2 | 13 | 12 | ~9 | ~6 | ~5 | ~3 | ~11 | ~10 | TX 1 | AREF | GND | RX 0 | RESET | 3.3v | GND | GND | Vin | A0 | A1 | A2 | A3 | A4 | A5 | 5v